# Altium PCB dev_board_layout.PcbDoc (part 3 of 3)
Units mm, origin at the board's own origin, x right, y up, seen from the top; angles counter-clockwise.
Board outline 75.44 x 30.86 mm, 2 copper layers (Top Layer, Bottom Layer); 166 components, 99 nets, 533 pads, 297 vias.
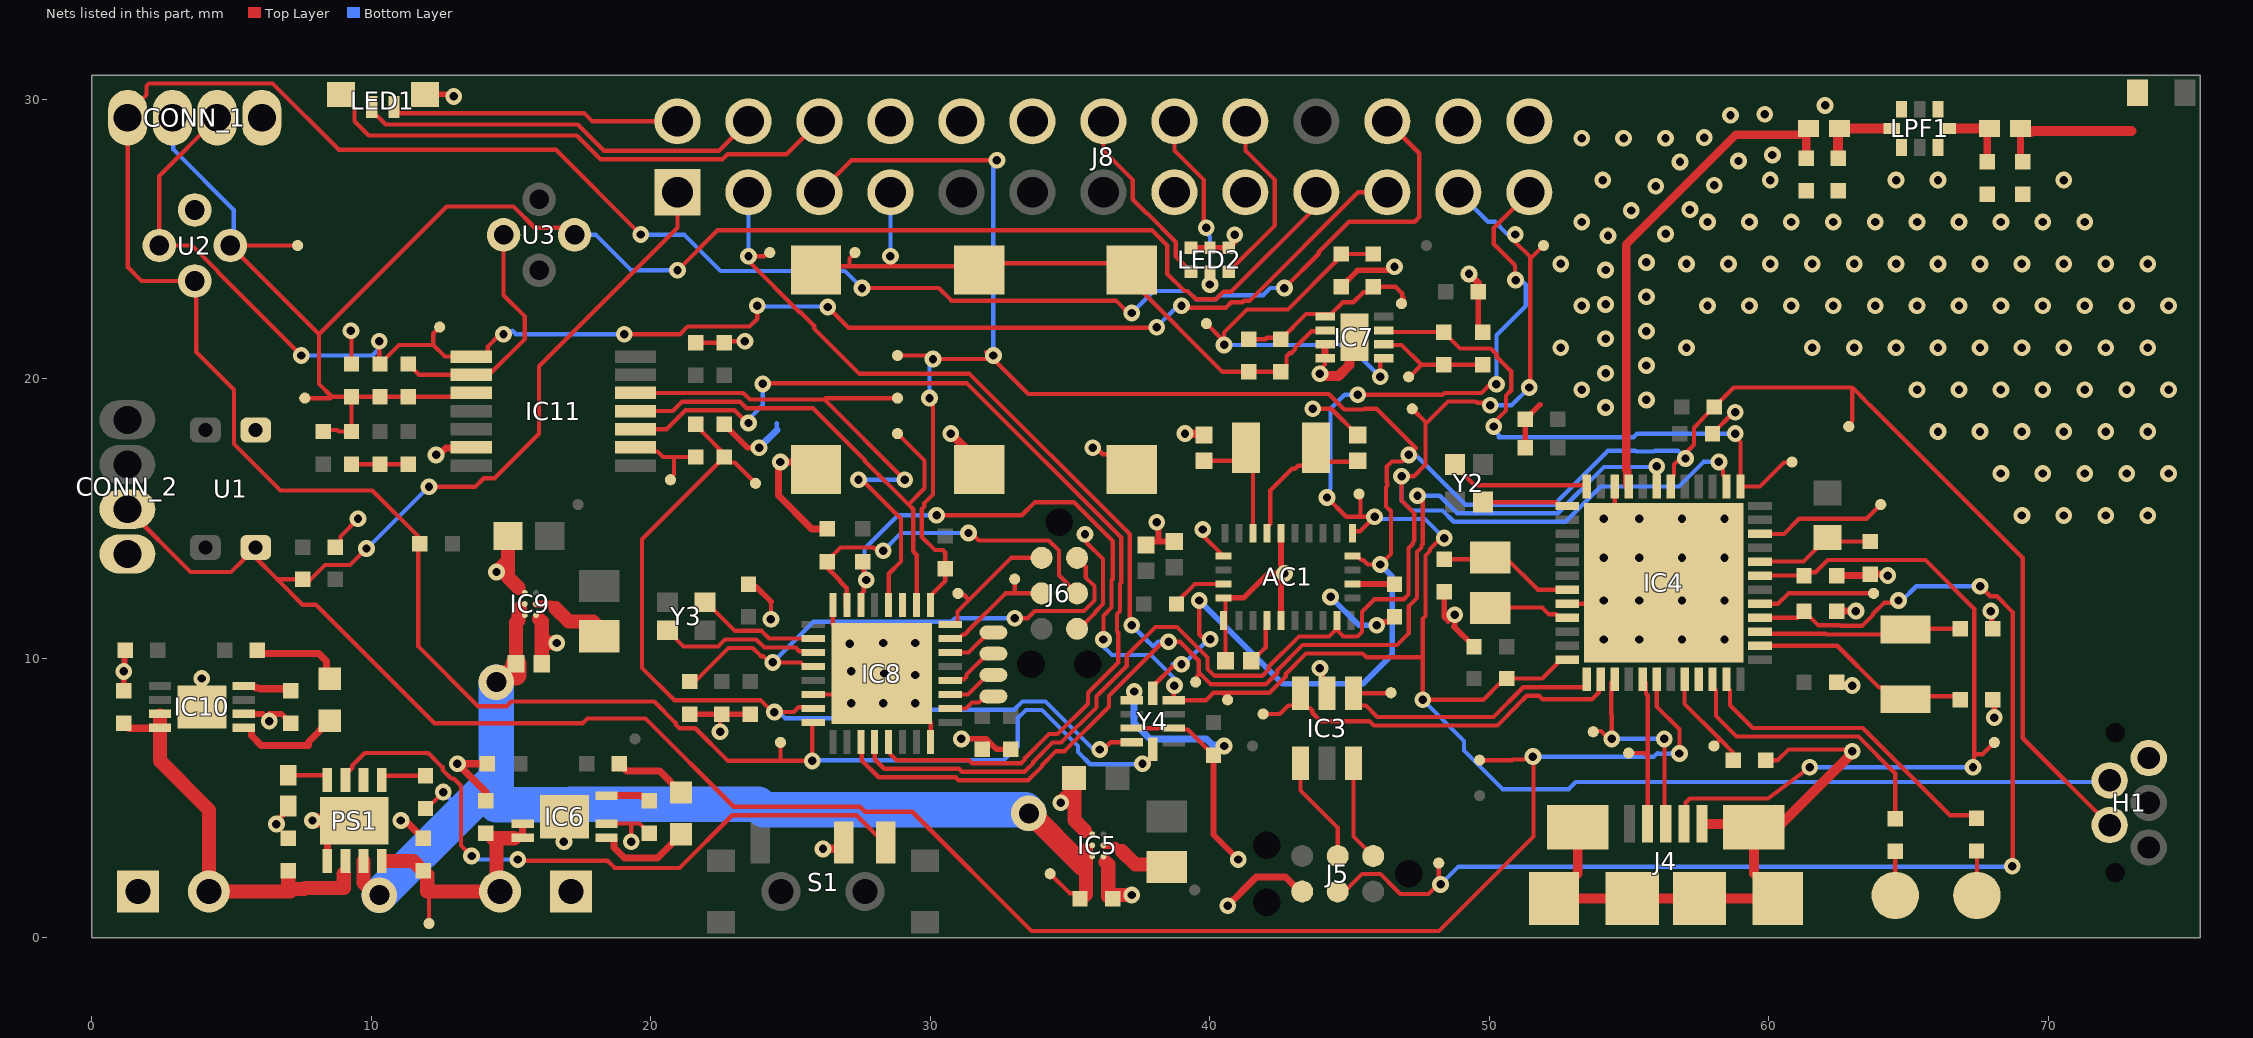
[diagram p2: the nets of this part, all layers, seen from the top]

## Via types
v1: diameter 0.6, hole 0.3, Top Layer to Bottom Layer, tented both sides, 260 vias
v2: diameter 0.6, hole 0.3, Top Layer to Bottom Layer, tented bottom, 25 vias
v3: diameter 1.27, hole 0.711, Top Layer to Bottom Layer, tented both sides, 8 vias
v4: diameter 0.762, hole 0.381, Top Layer to Bottom Layer, tented both sides, 2 vias
v5: diameter 1, hole 0.5, Top Layer to Bottom Layer, tented both sides, 2 vias

## Nets (pads, with @x,y where several pads share a name; then routed paths per layer and width w, separated by ;. In a path a pad name is that pad's centre, name@x,y a point inside that pad or via, vN(x,y) a via of type N, cw(c..) or ccw(c..) an arc to the next point about the centre after c; other vN are vias at no path point) (continued)
BLINK_SIG: CONN_2.2 IC4.42 J8.1 R3.1 TP3.1 U1.3 | length 94.5
  Top Layer w0.152: CONN_2.2@1.27,15.329 1.283,15.329 3.531,13.081 4.984,13.081 5.421,13.518 5.421,13.537 5.845,13.961 U1.3@5.864,13.961 5.864,13.591 6.628,12.827 ; v1(9.829,13.925) 9.234,13.331 8.343,13.331 7.793,12.781 7.747,12.735 7.747,12.827 R3.1@7.544,12.827 6.628,12.827 ; v1(12.065,16.129) 13.716,16.129 14.024,16.437 14.409,16.437 16.002,18.03 16.002,20.447 20.955,25.4 J8.1@20.955,26.67 ; TP3.1@49.657,6.35 50.814,6.35 50.835,6.371 51.249,6.371 51.27,6.391 51.476,6.391 v1(51.562,6.477) 51.583,6.456 51.583,3.618 48.206,0.241 33.622,0.241 29.356,4.507 27.661,4.507 27.483,4.684 22.968,4.684 19.812,7.841 17.732,7.841 17.562,7.671 12.258,7.671 8.016,11.913 7.542,11.913 6.628,12.827 ; IC4.42@55.99,9.246 55.99,8.272 56.804,7.458 v1(56.804,6.591)
  Bottom Layer w0.152: v1(9.829,13.925) 9.845,13.925 12.049,16.129 v1(12.065,16.129) ; v1(51.562,6.477) 55.894,6.477 56.021,6.604 56.042,6.583 56.48,6.583 56.501,6.604 56.769,6.604 56.782,6.591 v1(56.804,6.591)
BOOT0: IC4.4 J5.4 R8.2 TP14.1 | length 45.3
  Top Layer w0.152: J5.4@44.577,1.651 44.698,1.772 44.952,1.772 45.453,2.273 46.105,2.273 46.693,1.685 ; 46.694,1.685 46.817,1.562 47.824,1.562 48.167,1.905 v1(48.26,1.905) 48.193,1.972 TP14.1@48.193,2.667 ; IC4.4@59.69,11.446 61.027,11.446 R8.2@61.265,11.684 61.768,11.18 62.541,11.18 62.566,11.155 63.338,11.155 63.731,11.548 63.731,11.586 64.124,11.979 64.557,11.979 v1(64.643,12.065) ; v1(67.564,12.573) 67.924,12.213 68.164,12.213 68.728,11.649 68.728,2.561 v1(68.717,2.55)
  Bottom Layer w0.152: v1(48.26,1.905) 48.895,2.54 68.707,2.54 v1(68.717,2.55) ; v1(64.643,12.065) 64.77,12.065 65.278,12.573 v1(67.564,12.573)
BOOT0_ALT: IC8.31 J6.4 R17.2 | length 13.6
  Top Layer w0.152: IC8.31@26.964,11.9 26.964,12.24 26.956,12.249 26.964,12.249 IC8.31@27.009,12.204 ; v1(28.321,13.843) 28.235,13.929 27.985,13.929 27.954,13.959 26.786,13.959 26.299,13.472 26.187,13.36 26.776,12.771 26.776,12.735 27.009,12.502 IC8.31@27.009,12.204 ; v1(31.369,14.478) 31.47,14.478 31.737,14.211 34.241,14.211 34.605,13.847 34.605,12.967 J6.4@35.253,12.319 ; IC8.31@27.009,12.204 27.013,12.2 IC8.31@27.013,11.9 27.009,11.904 IC8.31@27.009,12.204
  Bottom Layer w0.152: v1(28.321,13.843) 28.956,14.478 v1(31.369,14.478)
CMOUT: C44.1 C47.1 C48.2 C51.2 CONN_1.2 IC11.3 J8.19 R25.1 TP46.1 TP53.1 U2.2 U3.2 | length 65.9
  Top Layer w0.152: TP53.1@7.366,24.765 U2.2@4.953,24.765 8.128,21.59 ; TP46.1@7.62,19.304 8.534,19.304 8.585,19.355 ; C51.2@8.277,18.11 8.328,18.161 8.785,18.161 8.836,18.11 R25.1@9.293,18.11 9.357,18.174 9.293,18.237 C48.2@9.293,19.355 ; IC11.3@13.577,19.491 13.441,19.355 C47.1@11.325,19.355 C44.1@10.309,19.355 C48.2@9.293,19.355 ; U3.2@17.272,25.146 17.018,25.4 15.846,25.4 15.084,26.162 12.7,26.162 8.128,21.59 ; v1(20.955,23.876) 22.391,25.312 37.934,25.312 38.481,24.765 38.481,23.749 39.095,23.135 39.208,23.135 39.503,22.839 40.224,22.839 40.499,23.114 40.767,23.114 43.815,26.162 J8.19@43.815,26.67 ; 8.128,21.59 8.128,19.812 8.585,19.355 ; 8.585,19.355 C48.2@9.293,19.355
  Bottom Layer w0.152: CONN_1.2@2.883,29.337 2.917,29.303 2.917,28.198 5.08,26.035 5.08,24.892 U2.2@4.953,24.765 ; U3.2@17.272,25.146 18.034,25.146 19.304,23.876 v1(20.955,23.876)
EXPANSION_INT: IC4.19 IC8.11 J8.3 TP9.1 TP43.1 | length 66
  Top Layer w0.152: TP9.1@24.257,24.511 24.19,24.511 24.063,24.384 v1(23.495,24.384) 23.495,24.21 25.332,22.373 25.365,22.373 25.845,21.893 25.845,21.795 27.467,20.172 31.407,20.172 37.139,14.44 v1@37.139,11.231 ; IC8.11@27.545,6.655 27.545,6.346 28.155,5.737 30.902,5.737 31.008,5.63 33.503,5.63 33.994,6.121 33.994,6.166 34.501,6.673 34.808,6.673 36.395,8.26 36.395,8.654 38.246,10.505 38.441,10.505 v1(38.526,10.591) 38.925,10.591 39.608,9.908 39.608,9.495 39.648,9.455 ; TP43.1@39.497,9.144 39.544,9.191 39.544,9.352 39.648,9.455 ; v1(47.434,15.811) 47.625,15.621 47.625,14.081 47.579,14.034 47.579,13.965 47.417,13.804 47.417,12.153 47.117,11.853 47.117,10.884 46.705,10.472 43.321,10.472 42.413,9.564 42.413,9.473 42.002,9.063 40.04,9.063 39.648,9.455 ; IC4.19@55.99,16.146 55.998,16.154 55.998,16.882 55.991,16.875 v1(55.991,16.862)
  Bottom Layer w0.152: v1(23.495,24.384) J8.3@23.495,26.67 ; v1(37.211,11.176) 37.815,10.572 37.821,10.572 37.979,10.414 38.155,10.591 v1(38.526,10.591) ; v1(47.434,15.811) 48.232,15.811 48.859,15.184 52.451,15.184 54.108,16.841 55.97,16.841 v1(55.991,16.862)
GND: AC1.2 AC1.5 AC1.6 AC1.10 AC1.25 C9.1 C10.2 C11.2 C12.2 C13.1 C14.1 C15.1 C16.2 C17.2 C18.2 C19.2 C20.2 C21.2 C22.2 C23.2 C24.1 C25.1 C26.2 C27.2 C28.2 C31.1 C32.2 C33.2 C34.1 C35.1 C36.1 C37.2 C38.2 C39.2 C40.1 C41.1 C42.2 C43.2 C45.1 C46.2 C48.1 C49.2 C52.2 C53.2 C54.2 C55.2 C56.2 CONN_1.4 CONN_2.1 D1.2 D2.2 D3.2 H1.5 IC3.2 IC4.22 IC4.32 IC4.49 IC5.A1 IC5.C2 IC6.6 IC6.9 IC7.3 IC7.4 IC7.9 IC8.6 IC8.16 IC8.32 IC8.33 IC9.A1 IC9.C2 IC10.6 IC10.9 IC11.6 J4.5 J4.6 J4.7 J4.8 J4.9 J4.10 J4.11 J5.6 J6.6 J8.8 J8.10 J8.12 J8.15 J8.24 J8.26 LED1.2 LED2.4 LED2.5 LED2.6 LPF1.1 LPF1.3 LPF1.5 LPF1.7 P3.1 P4.1 PS1.5 PS1.9 R2.1 R8.1 R10.1 R11.2 R14.1 R17.1 R20.1 R22.1 R27.2 S1.2 U1.4 U2.1 Y4.1 Y4.3 Y4.7 | length 149.9
  Top Layer w0.152: IC10.9@3.937,8.255 v1(3.937,9.271) ; R2.1@8.712,13.97 8.895,14.153 8.895,14.356 v1(9.525,14.986) v1@9.398,15.113 ; v1(9.271,21.717) 9.293,21.695 C48.1@9.293,20.523 ; IC6.6@18.415,4.08 19.304,4.08 ; v1(19.304,3.429) 19.304,4.08 ; R10.1@19.939,3.734 19.593,4.08 19.304,4.08 ; C45.1@21.612,21.285 C46.2@22.628,21.285 22.679,21.336 v1(23.368,21.336) ; v1(22.479,7.366) 22.479,7.937 C36.1@22.536,7.994 ; v1(24.298,11.389) 24.298,12.024 ; IC8.6@25.813,8.7 27.513,8.7 IC8.33@28.263,9.45 ; IC8.32@26.513,11.9 26.513,11.2 IC8.33@28.263,9.45 ; IC8.16@30.013,7 30.013,7.7 28.356,9.358 v2(28.356,9.45) IC8.33@28.263,9.45 ; J6.6@35.253,11.049 35.329,11.049 35.89,11.61 35.89,11.645 36.18,11.935 36.18,13.542 35.592,14.129 35.592,14.377 v1(35.534,14.435) ; v1(35.814,17.526) 35.941,17.526 36.172,17.295 36.661,17.295 D1.2@37.211,16.745 ; Y4.3@37.211,7.493 Y4.7@38.711,7.493 38.755,7.449 39.211,7.449 C39.2@40.132,6.528 ; Y4.1@37.211,8.493 37.211,8.722 v1(37.295,8.806) ; v1(39.751,14.605) 39.751,14.391 AC1.2@40.486,13.656 ; AC1.5@40.486,12.156 40.512,12.156 40.561,12.107 40.561,11.343 C54.2@40.561,9.906 ; v1(43.688,18.923) 44.348,18.923 45.285,17.986 C56.2@45.295,17.986 ; v1@44.028,20.089 v1(43.942,20.175) 43.942,20.32 44.128,20.506 IC7.4@44.128,20.725 ; IC7.9@44.997,21.294 IC7.9@45.178,21.475 ; R14.1@49.606,21.823 R14.1@49.763,21.666 ; C28.2@49.606,23.114 49.606,23.419 ; IC4.32@52.79,11.946 55.49,11.946 IC4.49@56.24,12.696 54.49,14.446 IC4.22@54.49,16.146 ; C21.2@57.988,18.034 58.75,18.796 v1(58.801,18.796) ; C9.1@59.893,6.35 60.325,6.35 60.706,6.731 62.929,6.731 v1(62.992,6.667) ; C17.2@62.433,9.144 62.56,9.017 v1(62.992,9.017) ; v1@66.055,27.11 v1(66.059,27.106)
  Top Layer w0.203: C43.2@1.143,8.839 v1(1.143,9.525) 1.168,9.55 1.168,10.262 C42.2@1.194,10.287 ; IC10.6@5.437,8.005 5.441,8.001 6.111,8.001 6.35,7.762 v1(6.35,7.747) ; v1@6.35,8.001 6.782,8.001 R22.1@7.112,7.671 ; v1(6.604,4.064) 6.604,4.158 6.828,4.381 6.828,4.512 R20.1@7.026,4.71 ; LED1.2@11.914,30.172 12.881,30.172 v1(12.954,30.099) ; v1(16.891,3.429) 16.915,3.453 IC6.9@16.915,4.33 ; C32.2@21.393,7.994 C36.1@22.536,7.994 C35.1@23.552,7.994 ; C49.2@22.628,18.364 23.466,17.526 v1(23.876,17.526) ; C31.1@23.768,12.554 24.298,12.024 ; v1(31.115,7.112) 32.004,7.112 32.373,6.743 C34.1@32.881,6.743 ; C53.2@37.592,14.176 38.163,14.176 ; v1(38.1,14.859) 38.163,14.795 38.163,14.176 ; C52.2@38.735,14.176 38.163,14.176 ; LED2.6@39.33,24.682 LED2.5@40.005,24.682 LED2.4@40.68,24.682 40.894,24.896 v1(40.894,25.146) ; C39.2@40.132,6.528 40.132,3.683 v1(41.021,2.794) ; AC1.5@40.512,12.156 41.213,12.156 42.087,13.03 v1(42.676,13.03) ; AC1.10@42.549,11.343 v1@42.549,12.796 ; 42.549,13.348 AC1.25@42.549,14.468 ; v1(43.942,9.639) 44.018,9.563 44.018,8.921 IC3.2@44.196,8.743 ; R11.2@44.704,23.292 45.288,23.876 46.482,23.876 v1(46.609,24.003) ; v1@46.213,11.307 46.436,11.307 R27.2@46.609,11.481 ; C16.2@48.387,12.37 48.387,11.481 48.539,11.328 ; v1(48.768,11.557) 48.768,11.176 48.73,11.138 C19.2@49.454,10.414 ; R14.1@49.606,21.823 C28.2@49.606,23.114 ; C22.2@51.287,17.526 C23.2@51.287,18.542 51.816,19.071 ; v1(67.945,11.684) 67.983,11.646 67.983,11.087 C11.2@68.021,11.049 ; C10.2@68.021,8.509 67.945,8.509 68.072,8.382 v1(68.072,7.874)
  Top Layer w0.254: PS1.5@8.427,2.745 PS1.9@8.427,3.595 ; PS1.9@9.398,4.191 PS1.9@10.031,3.558 ; v1(11.06,4.191) 10.922,4.191 10.898,4.167 11.243,4.167 C37.2@11.852,3.558 ; v1(12.319,17.272) 12.337,17.29 12.438,17.29 12.671,17.522 13.558,17.522 IC11.6@13.577,17.541 ; C27.2@14.097,4.902 14.097,5.207 v1(13.081,6.223) C26.2@14.148,6.223 ; D3.2@26.272,16.381 D3.2@25.908,16.745 25.546,16.745 25.273,17.018 v1(24.638,17.018) 24.572,16.952 24.572,15.814 25.762,14.624 R17.1@26.315,14.624 ; v1(40.64,1.143) 41.135,1.638 41.135,1.644 41.663,2.172 42.711,2.172 43.232,1.651 J5.6@43.307,1.651 ; IC7.4@44.128,20.725 IC7.3@44.128,21.225 ; v1(49.276,23.749) 49.606,23.419 ; R8.1@62.433,11.684 v1(63.119,11.684) ; C20.2@62.433,12.954 63.576,12.954 C18.2@63.627,13.005 64.211,13.005 v1(64.262,12.954)
  Top Layer w0.305: v1(26.162,3.175) 26.714,3.175 26.912,3.373 S1.2@26.912,3.401 ; v1(30.734,18.034) 31.75,17.018 D2.2@31.75,16.745 ; v1(39.116,18.034) 39.747,18.034 C55.2@39.795,17.986
  Top Layer w0.356: v1@44.028,20.089 44.6,20.089 44.997,20.486 IC7.9@44.997,21.294 ; J4.6@53.859,3.556 53.168,3.556 53.168,2.297 52.318,1.447 J4.8@52.318,1.397 J4.9@55.118,1.397 J4.10@57.518,1.397 60.068,1.397 60.068,1.697 59.468,2.297 J4.7@59.468,3.947 ; J4.5@57.618,3.597 J4.5@57.618,4.072 59.343,4.072 J4.7@59.468,3.947 ; v1(62.992,6.667) 62.992,6.604 60.335,3.947 J4.7@59.468,3.947
  Top Layer w0.508: v1(7.898,4.191) PS1.9@9.023,4.191 ; PS1.9@8.427,3.595 PS1.9@9.023,4.191 ; PS1.9@9.398,4.191 PS1.9@9.023,4.191 ; v1(14.478,13.081) 14.89,13.493 ; C41.1@14.89,14.37 14.89,13.493 ; 15.264,12.518 14.89,12.892 14.89,13.493 ; 16.004,11.405 16.1,11.309 16.1,10.554 ; C40.1@16.1,9.798 16.1,10.554 ; v1(16.637,10.541) 16.624,10.554 16.1,10.554 ; v1(34.671,4.826) 35.147,5.302 C25.1@35.147,5.715 ; C25.1@35.16,5.677 35.16,4.199 35.534,3.825 ; 36.274,2.712 36.37,2.616 36.37,1.476 36.418,1.524 v1(37.211,1.524)
  Bottom Layer w0.152: 24.511,18.161 24.511,18.415
  Bottom Layer w0.203: v1(44.323,12.192) 45.339,11.176 v1(45.974,11.176)
  Bottom Layer w0.254: v1(23.876,17.526) 24.511,18.161 ; v1(37.295,8.806) 37.295,7.683 37.866,7.112 39.878,7.112 40.101,6.889 40.482,6.889 v1(40.513,6.858)
  other v1: 69.059,15.106 70.559,15.106 72.059,15.106 73.559,15.106 68.309,16.606 69.809,16.606 71.309,16.606 72.809,16.606 74.309,16.606 66.059,18.106 67.559,18.106 69.059,18.106 70.559,18.106 72.059,18.106 73.559,18.106 54.164,18.968 55.624,19.24 53.309,19.606 65.309,19.606 66.809,19.606 68.309,19.606 69.809,19.606 71.309,19.606 72.809,19.606 74.309,19.606 54.164,20.198 55.624,20.47 52.559,21.106 57.059,21.106 61.559,21.106 63.059,21.106 64.559,21.106 66.059,21.106 67.559,21.106 69.059,21.106 70.559,21.106 72.059,21.106 73.559,21.106 54.164,21.428 55.624,21.7 53.309,22.606 57.809,22.606 59.309,22.606 60.809,22.606 62.309,22.606 63.809,22.606 65.309,22.606 66.809,22.606 68.309,22.606 69.809,22.606 71.309,22.606 72.809,22.606 74.309,22.606 54.164,22.658 55.624,22.93 54.164,23.888 52.559,24.106 57.059,24.106 58.559,24.106 60.059,24.106 61.559,24.106 63.059,24.106 64.559,24.106 66.059,24.106 67.559,24.106 69.059,24.106 70.559,24.106 72.059,24.106 73.559,24.106 55.624,24.16 54.25,25.115 56.311,25.18 53.309,25.606 57.809,25.606 59.309,25.606 60.809,25.606 62.309,25.606 63.809,25.606 65.309,25.606 66.809,25.606 68.309,25.606 69.809,25.606 71.309,25.606 55.085,26.018 57.181,26.05 55.955,26.888 58.051,26.92 54.059,27.106 60.059,27.106 64.559,27.106 70.559,27.106 56.825,27.758 58.92,27.789 60.132,28.002 53.309,28.606 54.809,28.606 56.309,28.606 57.694,28.627 58.633,29.423 59.862,29.462 62.017,29.778
  other v2: 27.178,8.382 28.321,8.382 29.464,8.382 29.464,9.398 27.178,9.525 27.12,10.516 28.321,10.541 29.464,10.541 54.102,10.668 55.372,10.668 56.896,10.668 58.42,10.668 54.102,12.065 55.372,12.065 56.896,12.065 58.42,12.065 54.102,13.589 55.372,13.589 56.896,13.589 58.42,13.589 54.102,14.986 55.372,14.986 56.896,14.986 58.42,14.986
I2C1_SCL: AC1.19 H1.2 IC4.18 IC8.25 J8.5 R6.1 R15.1 TP6.1 TP41.1 Y4.10 | length 108.9
  Top Layer w0.152: J8.5@26.035,26.67 27.178,27.813 v1(32.385,27.813) ; TP41.1@28.829,20.828 29.851,20.828 29.978,20.701 v1(30.099,20.701) 32.01,20.701 v1@32.134,20.825 ; v1(29.972,19.304) 29.972,19.253 29.921,19.253 30.099,19.075 30.099,15.86 29.789,15.55 29.789,15.424 29.697,15.332 29.697,14.337 30.168,13.866 30.448,13.866 30.537,13.777 R15.1@30.537,13.201 30.537,12.757 30.013,12.233 IC8.25@30.013,11.9 ; v1@32.194,20.764 33.507,19.452 44.26,19.452 44.815,18.897 45.514,18.897 45.54,18.923 45.97,18.923 47.369,17.524 v1(47.117,17.272) ; Y4.10@37.961,8.743 37.961,8.993 38.661,9.693 38.903,9.693 v1(38.989,9.779) ; v1(39.624,12.065) 39.624,10.854 39.878,10.6 39.956,10.679 v1(40.016,10.679) ; AC1.19@45.112,13.656 45.274,13.656 45.421,13.51 45.494,13.51 45.654,13.349 v1(46.101,13.349) 46.482,13.73 46.482,15.254 46.304,15.432 46.304,16.128 46.355,16.179 46.355,16.27 46.334,16.291 46.334,16.856 46.517,17.039 46.884,17.039 v1(47.117,17.272) ; v1@47.371,17.272 v1(47.117,17.272) ; IC4.18@56.49,16.146 56.49,16.421 56.611,16.542 56.611,16.926 57.323,17.638 57.323,18.242 57.619,18.538 57.619,18.553 R6.1@58.052,18.986 58.75,19.685 62.992,19.685 ; TP6.1@62.865,18.288 62.865,18.355 62.992,18.482 62.992,19.685 ; H1.2@72.198,4.026 69.088,7.136 69.088,13.589 63.6,19.077 63.59,19.077 63.28,19.387 63.28,19.397 62.992,19.685 ; v1@32.134,20.825 32.137,20.828 32.194,20.828 v1(32.258,20.828) 32.131,20.955 32.004,20.955 v1@32.134,20.825
  Bottom Layer w0.152: v1(29.972,19.304) v1@29.972,20.612 ; v1(32.258,20.828) 32.258,27.686 v1(32.385,27.813) ; 38.667,9.779 38.677,9.769 38.686,9.779 v1(38.989,9.779) 39.053,9.779 39.952,10.679 v1(40.016,10.679) ; v1(47.117,17.272) 47.371,17.272 49.154,15.489 52.319,15.489 54.25,17.42 55.222,17.42 55.251,17.39 55.903,17.39 55.932,17.42 56.748,17.42 v1(57.023,17.145)
  Bottom Layer w0.203: v1(39.624,12.065) 42.604,9.085 45.488,9.085 46.528,10.125 46.528,12.921 46.101,13.348 v1(46.101,13.349)
I2C1_SDA: AC1.20 H1.4 IC4.36 IC8.30 J8.25 R7.1 R16.1 TP7.1 TP49.1 Y4.9 | length 93.6
  Top Layer w0.152: IC8.30@27.464,11.636 27.489,11.661 27.489,12.262 27.616,12.389 R16.1@27.616,13.201 ; v1(30.226,15.113) 33.274,15.113 33.744,15.583 35.134,15.583 36.53,14.187 36.53,12.835 36.485,12.79 36.485,11.809 36.195,11.519 v1(36.195,10.668) ; v1(38.735,9.017) 38.711,8.993 Y4.9@38.711,8.493 39.862,8.493 40.127,8.758 40.472,8.758 ; TP7.1@40.64,8.509 40.64,8.576 40.53,8.686 40.53,8.7 40.472,8.758 ; v1(44.196,15.748) 44.883,15.061 45.391,15.061 ; AC1.20@45.112,14.468 45.112,14.49 45.161,14.538 45.376,14.538 v1(45.899,15.061) 45.391,15.061 ; v1(45.295,19.426) 48.332,19.426 48.398,19.492 49.718,19.492 50.08,19.854 50.206,19.854 v1(50.258,19.802) ; TP49.1@45.339,15.875 45.386,15.828 45.386,15.667 45.391,15.662 45.391,15.061 ; v1(48.387,14.296) 48.272,14.296 47.883,13.908 47.883,13.839 47.722,13.677 47.722,11.51 47.625,11.413 47.625,10.03 ; v1(50.943,23.527) 50.918,23.552 50.918,24.056 50.165,24.809 50.165,25.4 J8.25@51.435,26.67 ; IC4.36@52.79,9.946 52.574,9.946 51.899,9.271 R7.1@50.622,9.271 50.423,9.072 50.347,9.072 49.784,8.509 v1(47.625,8.509) 47.625,10.03 ; 40.472,8.758 42.128,8.758 42.717,9.347 42.717,9.438 43.447,10.167 45.468,10.167 45.604,10.03 47.625,10.03
  Bottom Layer w0.152: v1(27.706,12.795) 27.643,12.858 27.643,13.913 28.843,15.113 v1(30.226,15.113) ; v1(36.195,10.668) 36.131,10.604 36.131,10.478 36.5,10.109 37.897,10.109 38.735,9.271 v1(38.735,9.017) ; v1(44.196,15.748) 44.282,15.834 44.282,16.02 44.323,16.061 44.323,18.923 44.826,19.426 v1(45.295,19.426) ; v1(45.899,15.061) 45.982,14.978 47.705,14.978 v1(48.387,14.296) ; v1(47.625,8.509) 49.094,7.04 49.094,6.697 50.477,5.313 52.843,5.313 53.097,5.567 72.139,5.567 H1.4@72.198,5.626 ; v1(50.258,19.802) 50.258,21.556 51.308,22.606 51.308,23.368 51.234,23.442 51.028,23.442 v1(50.943,23.527)
IMU_CLK_IN: AC1.27 C55.1 Y5.1 | length 5.1
  Top Layer w0.152: C55.1@39.795,17.066 41.057,17.066 41.057,17.288 Y5.1@41.295,17.526 41.549,17.526 AC1.27@41.549,14.468
IMU_CLK_OUT: AC1.26 C56.1 Y5.2 | length 5.7
  Top Layer w0.152: AC1.26@42.049,14.468 42.049,14.68 42.164,14.795 42.164,15.995 42.945,16.776 43.045,16.776 43.156,16.887 43.371,16.887 43.795,17.31 Y5.2@43.795,17.45 ; Y5.2@43.795,17.526 Y5.2@43.795,17.45 ; C56.1@45.295,17.066 45.295,17.026 44.219,17.026 Y5.2@43.795,17.45
IMU_INT: AC1.14 IC4.14 IC8.12 J8.23 TP8.1 TP48.1 | length 60.7
  Top Layer w0.152: IC8.12@28.013,6.687 28.013,6.383 28.354,6.042 31.028,6.042 31.135,5.935 33.377,5.935 33.689,6.247 33.689,6.292 34.375,6.978 34.682,6.978 35.945,8.241 35.945,8.635 37.028,9.718 37.028,10.09 38.058,11.119 38.827,11.119 39.92,10.027 39.92,9.614 40.166,9.367 41.876,9.367 42.108,9.6 42.108,9.69 43.195,10.777 44.269,10.777 AC1.14@44.5,11.008 ; AC1.14@44.549,11.343 44.549,11.008 44.781,10.777 45.282,10.777 45.445,10.941 45.445,11.663 45.89,12.108 46.941,12.108 47.113,12.28 47.113,13.93 47.274,14.091 47.274,14.16 47.32,14.207 47.32,15.178 46.863,15.635 v1@46.863,16.27 ; v1(46.863,16.51) 47.307,16.51 47.72,16.923 47.72,18.383 ; TP48.1@47.244,18.923 47.72,18.447 47.72,18.383 ; v1(50.038,19.05) 49.952,19.136 49.568,19.136 49.516,19.187 48.524,19.187 47.72,18.383 ; v1(50.927,25.16) 50.927,24.892 51.471,24.348 ; v1(51.435,19.685) 51.471,19.721 51.471,23.419 51.471,24.348 ; TP8.1@51.943,24.765 51.526,24.348 51.471,24.348 ; v1@58.254,17.023 v1(58.219,17.023) 58.219,16.902 58.369,16.753 58.369,16.542 58.49,16.421 IC4.14@58.49,16.146
  Bottom Layer w0.152: v1(46.863,16.51) 46.863,15.635 47.216,15.283 48.33,15.283 48.733,14.88 52.724,14.88 53.99,16.146 56.786,16.146 57.663,17.023 v1(58.219,17.023) ; J8.23@48.895,26.67 49.952,25.613 50.206,25.613 50.659,25.16 v1(50.927,25.16) ; v1(50.038,19.05) 50.8,19.05 v1(51.435,19.685)
LED_LEFT_FRONT_B: J8.18 LED2.3 | length 6.5
  Top Layer w0.152: LED2.3@40.68,23.832 42.329,25.481 42.329,27.106 41.275,28.16 J8.18@41.275,29.207
LED_LEFT_FRONT_G: J8.14 LED2.1 | length 6.7
  Top Layer w0.152: J8.14@36.195,29.207 36.195,28.16 37.249,27.106 37.249,26.403 37.744,25.908 37.769,25.908 38.786,24.891 38.786,24.376 LED2.1@39.33,23.832
LED_LEFT_FRONT_R: J8.16 LED2.2 | length 6.5
  Top Layer w0.152: J8.16@38.735,29.207 38.735,28.16 39.789,27.106 39.789,25.489 v1(39.878,25.4) ; v1@39.878,23.495 v1(40.005,23.368)
  Bottom Layer w0.152: v1(39.878,25.4) 39.964,25.314 39.964,25.128 40.005,25.087 v1(40.005,23.368)
LED_LEFT_SIDE_B: J8.4 LED1.4 | length 14.7
  Top Layer w0.152: LED1.4@10.014,29.722 10.014,29.522 10.138,29.398 10.215,29.398 10.519,29.093 17.389,29.093 18.329,28.153 22.441,28.153 J8.4@23.495,29.207
LED_LEFT_SIDE_G: J8.2 LED1.3 | length 10.4
  Top Layer w0.152: LED1.3@10.814,29.722 11.043,29.493 17.624,29.493 17.91,29.207 J8.2@20.955,29.207
LED_LEFT_SIDE_R: J8.6 LED1.1 | length 19
  Top Layer w0.152: LED1.1@8.914,30.172 8.964,30.172 9.338,29.798 9.338,29.748 9.398,29.688 9.398,29.21 9.906,28.702 17.349,28.702 18.202,27.849 22.568,27.849 22.747,28.028 24.856,28.028 J8.6@26.035,29.207
LH_DIODE_ARRAY: C30.2 D1.1 D2.1 D3.1 IC7.2 J8.7 R12.1 TP44.1 | length 24.1
  Top Layer w0.152: D3.1@25.908,24.022 27.109,24.022 ; TP44.1@27.305,24.511 27.305,24.494 27.109,24.298 27.109,24.022 ; v1@28.575,24.13 v1(28.575,24.384) ; IC7.2@44.128,21.725 44.099,21.696 43.639,21.696 43.049,21.106 43.049,21.043 42.915,20.909 42.851,20.909 42.744,20.801 42.744,20.443 C30.2@42.545,20.244 R12.1@41.402,20.244 40.462,20.244 37.211,23.495 D1.1@37.211,23.895 36.976,24.13 31.985,24.13 31.877,24.022 27.109,24.022
  Bottom Layer w0.152: v1(28.575,24.384) J8.7@28.575,26.67
LH_INV_AMP_N: IC7.6 R13.1 R14.2 TP24.1 | length 4.5
  Top Layer w0.152: IC7.6@46.228,21.225 46.244,21.209 46.863,21.209 47.574,20.498 ; TP24.1@47.117,20.066 47.143,20.066 47.574,20.498 ; R14.2@49.763,20.498 R13.1@48.366,20.498 47.574,20.498
LH_SIG: IC4.13 IC7.7 R13.2 TP23.1 | length 20.8
  Top Layer w0.152: IC7.7@46.228,21.725 46.287,21.666 R13.2@48.366,21.666 48.95,21.082 50.052,21.082 50.267,20.867 50.267,20.782 50.786,20.262 50.786,19.583 50.601,19.398 50.601,18.866 50.165,18.429 v1(50.165,18.288) ; v1(58.801,18.034) 58.747,17.98 58.99,17.738 IC4.13@58.99,16.391 ; IC4.13@59.064,16.465 IC4.13@58.99,16.391 ; TP23.1@60.833,17.018 60.818,17.003 60.547,17.003 59.69,16.146 IC4.13@58.99,16.146 IC4.13@58.99,16.391
  Bottom Layer w0.152: v1(50.165,18.288) 50.165,18.156 50.377,17.944 50.339,17.906 55.166,17.906 55.294,18.034 v1(58.801,18.034)
MUX_CTRL: PS1.2
MUX_STATUS: PS1.1 R19.2 | length 1.7
  Top Layer w0.152: PS1.1@10.373,5.641 10.373,5.692 10.472,5.791 R19.2@11.938,5.791
MUX_SWITCH: PS1.3 S1.3 | length 24.8
  Top Layer w0.152: PS1.3@9.073,5.641 9.073,5.891 9.172,5.99 9.23,5.99 9.319,6.079 9.319,6.161 9.763,6.604 11.96,6.604 11.963,6.6 12.045,6.6 12.552,6.093 12.552,6.004 12.862,5.694 12.951,5.694 13.208,5.437 13.208,3.302 v1(13.589,2.921) ; v1(15.24,2.794) 15.286,2.748 18.461,2.748 18.715,2.494 21.032,2.494 22.917,4.38 27.357,4.38 28.056,3.681 28.412,3.681 S1.3@28.412,3.401 28.412,3.285 S1.3@28.138,3.012
  Bottom Layer w0.152: v1(13.589,2.921) 13.716,2.794 v1(15.24,2.794)
NetAC1_4: AC1.4 R26.1 | length 2
  Top Layer w0.152: R26.1@38.811,11.938 38.811,12 39.467,12.656 AC1.4@40.486,12.656
NetAC1_9: AC1.9 C54.1 | length 1.7
  Top Layer w0.152: C54.1@41.481,9.906 41.529,9.906 41.999,10.376 AC1.9@41.999,11.082 ; AC1.9@42,11.082 42.049,11.131 AC1.9@42.049,11.343
NetAC1_17: AC1.17 R27.1 | length 1.5
  Top Layer w0.203: AC1.17@45.112,12.656 R27.1@46.602,12.656
  Top Layer w0.305: R27.1@46.602,12.656 R27.1@46.609,12.649
NetANT1_1: ANT1.1 C15.2 L2.2 | length 5.3
  Top Layer w0.254: C15.2@69.088,27.762 69.003,27.847 L2.2@69.003,28.956 69.176,28.783 69.395,28.783 69.479,28.867
  Top Layer w0.356: 69.479,28.867 72.987,28.867
NetC13_2: C13.2 L1.2 LPF1.8 | length 3
  Top Layer w0.356: C13.2@62.484,27.889 L1.2@62.484,28.914 ; L1.2@62.526,28.956 LPF1.8@64.405,28.956
  Top Layer w0.508: L1.2@62.484,28.914 L1.2@62.526,28.956
NetC14_2: C14.2 L2.1 LPF1.4 | length 2.7
  Top Layer w0.254: C14.2@67.818,27.762 67.818,28.871 L2.1@67.903,28.956
  Top Layer w0.356: LPF1.4@66.405,28.956 L2.1@67.903,28.956
NetC29_2: C29.2 IC7.5 R11.1 TP21.1 | length 14.8
  Top Layer w0.152: TP21.1@39.878,21.971 40.427,21.422 40.427,21.295 v1(40.513,21.209) 40.513,21.653 41.338,22.479 42.799,22.479 44.505,24.185 44.505,24.262 R11.1@44.704,24.46 C29.2@45.847,24.46 ; v1(46.101,20.066) 46.101,20.651 46.175,20.725 IC7.5@46.228,20.725
  Bottom Layer w0.152: v1(40.513,21.209) 44.958,21.209 v1(46.101,20.066)
NetC47_2: C47.2 IC11.2 U3.4 | length 8.9
  Top Layer w0.152: C47.2@11.325,20.523 11.707,20.141 IC11.2@13.577,20.141 14.213,20.141 15.494,21.422 15.494,22.225 14.732,22.987 U3.4@14.732,25.146
NetC50_2: C50.2 R24.1 R25.2 | length 2
  Top Layer w0.152: R25.2@9.293,16.942 R24.1@10.309,16.942 C50.2@11.325,16.942
NetDS1_1: DS1.1 R9.1 | length 2.6
  Top Layer w0.254: R9.1@18.872,6.223 19.126,5.969 20.308,5.969 DS1.1@21.082,5.195
NetDS1_2: DS1.2 IC6.5 | length 3.3
  Top Layer w0.254: IC6.5@18.598,3.58 18.665,3.58 18.688,3.557 18.688,3.226 19.064,2.85 20.237,2.85 DS1.2@21.082,3.695
NetDS2_1: DS2.1 R21.1 | length 3.3
  Top Layer w0.254: R21.1@5.918,10.16 8.128,10.16 8.397,9.891 8.397,9.371 DS2.1@8.509,9.259
NetDS2_2: DS2.2 IC10.5 | length 3.9
  Top Layer w0.254: IC10.5@5.437,7.505 5.687,7.505 5.71,7.482 5.71,7.232 6.062,6.88 7.747,6.88 7.747,6.997 DS2.2@8.509,7.759
NetIC3_4: IC3.4 J5.3 | length 3.9
  Top Layer w0.152: IC3.4@43.246,6.243 43.246,5.268 44.577,3.937 J5.3@44.577,2.921
NetIC3_6: IC3.6 J5.1 | length 3.6
  Top Layer w0.152: IC3.6@45.146,6.243 45.146,3.622 J5.1@45.847,2.921
NetIC4_5: IC4.5 TP18.1 | length 4.2
  Top Layer w0.152: IC4.5@59.69,11.946 60.333,11.946 60.706,12.319 TP18.1@63.754,12.319
NetIC4_10: IC4.10 TP19.1 | length 4.8
  Top Layer w0.152: IC4.10@59.69,14.446 60.547,14.446 61.093,14.992 62.698,14.992 62.703,14.986 63.5,14.986 TP19.1@64.008,15.494
NetIC5_B1: IC5.B1 L4.1 | length 2.6
  Top Layer w0.152: 36.755,3.197 36.861,3.091
  Top Layer w0.254: IC5.B1@36.22,3.302 36.65,3.302 36.755,3.197
  Top Layer w0.508: 36.861,3.091 37.338,2.614 38.2,2.614 L4.1@38.45,2.364
NetIC6_8: IC6.8 R10.2 | length 1.6
  Top Layer w0.254: IC6.8@18.415,5.08 19.642,5.08 19.672,5.05 19.791,5.05 R10.2@19.939,4.902
NetIC8_18: IC8.18 TP34.1 | length 1.7
  Top Layer w0.152: IC8.18@30.713,8.2 31.28,8.2 31.495,8.415 31.745,8.415 31.966,8.636 TP34.1@32.258,8.636
NetIC8_19: IC8.19 TP33.1 | length 1.8
  Top Layer w0.152: IC8.19@30.713,8.7 31.349,8.7 32.047,9.398 TP33.1@32.258,9.398
NetIC8_20: IC8.20 TP31.1 | length 2
  Top Layer w0.152: IC8.20@30.713,9.2 30.762,9.249 31.209,9.249 31.298,9.338 31.298,9.412 32.046,10.16 TP31.1@32.258,10.16
NetIC8_22: IC8.22 TP29.1 | length 1.8
  Top Layer w0.152: IC8.22@30.713,10.2 31.371,10.2 32.093,10.922 TP29.1@32.258,10.922
NetIC9_B1: IC9.B1 L5.1 | length 2.7
  Top Layer w0.152: 16.437,11.938 16.591,11.784
  Top Layer w0.254: IC9.B1@15.894,11.938 16.437,11.938
  Top Layer w0.508: 16.591,11.784 17.068,11.307 17.93,11.307 L5.1@18.18,11.057
NetIC10_8: IC10.8 R22.2 | length 1.7
  Top Layer w0.254: IC10.8@5.437,9.005 5.46,8.982 5.811,8.982 5.859,8.934 5.983,8.934 6.013,8.904 7.047,8.904 R22.2@7.112,8.839
NetIC11_9: IC11.9 R23.1 TP52.1 | length 2.6
  Top Layer w0.152: IC11.9@20.096,17.541 20.096,17.411 20.114,17.392 20.244,17.392 20.441,17.196 20.828,17.196 ; TP52.1@20.701,16.383 20.701,16.45 20.828,16.577 20.828,17.196 ; R23.1@21.612,17.196 20.828,17.196
NetP1_1: P1.1 R4.2 | length 1.6
  Top Layer w0.152: R4.2@67.437,3.099 67.449,3.087 P1.1@67.449,1.512
NetP2_1: P2.1 R5.2 | length 1.6
  Top Layer w0.152: P2.1@64.528,1.512 R5.2@64.528,3.087
NetPS1_4: PS1.4 R20.2 | length 1.5
  Top Layer w0.152: R20.2@7.026,5.81 8.324,5.81 8.423,5.711 PS1.4@8.423,5.641
NetQ1_1: 
NetQ1_2: 
NRST: C20.1 IC4.7 J4.4 TP11.1 | length 26.7
  Top Layer w0.152: J4.4@56.968,4.072 57.023,4.127 57.023,4.826 57.173,4.976 59.967,4.976 v1(61.468,6.096) ; IC4.7@59.69,12.946 59.698,12.954 C20.1@61.265,12.954 61.384,13.073 61.679,13.073 62.114,13.508 65.613,13.508 67.356,11.765 67.356,6.523 ; v1(67.31,6.096) 67.356,6.523 ; TP11.1@68.072,6.985 67.65,6.563 67.396,6.563 67.356,6.523
  Bottom Layer w0.152: v1(61.468,6.096) v1(67.31,6.096)
NRST_ALT: C32.1 IC8.4 J6.2 | length 19.4
  Top Layer w0.152: C32.1@21.393,9.163 21.584,9.163 22.784,10.363 23.647,10.363 23.938,10.072 24.019,10.072 24.243,9.849 v1(24.364,9.849) 24.367,9.846 25.375,9.846 25.464,9.757 25.464,9.749 25.513,9.7 IC8.4@25.813,9.7 ; v1(33.02,11.43) 33.484,11.43 33.738,11.684 35.498,11.684 35.875,12.061 35.875,12.577 35.56,12.892 35.56,13.282 J6.2@35.253,13.589
  Bottom Layer w0.152: v1(24.364,9.849) 25.819,11.303 30.763,11.303 30.89,11.43 v1(33.02,11.43)
PA0: 
RCC_OSC32_IN: C10.1 IC4.2 Y1.1 | length 8
  Top Layer w0.152: IC4.2@59.69,10.446 62.452,10.446 63.945,8.953 64.258,8.953 64.681,8.529 Y1.1@64.897,8.529 65.004,8.529 65.024,8.509 65.151,8.636 C10.1@66.853,8.636
RCC_OSC32_OUT: C11.1 IC4.3 Y1.2 | length 7.3
  Top Layer w0.152: IC4.3@59.69,10.946 59.76,10.876 62.042,10.876 62.067,10.851 64.719,10.851 64.917,11.049 C11.1@66.853,11.049
RCC_OSC_IN: IC4.25 Y2.3 | length 3.1
  Top Layer w0.152: Y2.3@49.776,15.581 52.38,15.581 52.515,15.446 IC4.25@52.79,15.446
RCC_OSC_IN_ALT: IC8.2 Y3.3 | length 4.4
  Top Layer w0.152: Y3.3@21.941,12 22.215,11.726 22.263,11.726 23.012,10.977 23.962,10.977 24.239,10.7 IC8.2@25.813,10.7
RCC_OSC_OUT: IC4.24 Y2.1 | length 5.1
  Top Layer w0.152: Y2.1@48.776,16.931 48.776,16.883 49.022,16.637 49.045,16.637 49.05,16.632 49.05,16.609 49.197,16.462 49.474,16.185 53.451,16.185 IC4.24@53.49,16.146
RCC_OSC_OUT_ALT: IC8.3 Y3.1 | length 5.8
  Top Layer w0.152: Y3.1@20.591,11 21.17,10.421 22.411,10.421 22.658,10.668 23.774,10.668 24.064,10.377 25.183,10.377 25.311,10.249 25.764,10.249 IC8.3@25.813,10.2
RF_OUT: C12.1 IC4.21 L1.1 | length 18
  Top Layer w0.305: IC4.21@54.99,16.146 54.945,16.191 54.945,16.697 54.894,16.748 54.894,24.795 58.831,28.732 61.127,28.732 61.351,28.956 L1.1@61.387,28.956 ; C12.1@61.341,27.889 61.341,28.91 L1.1@61.387,28.956 ; L1.1@61.426,28.956 L1.1@61.387,28.956
SPI3_MISO: IC8.27
SPI3_MOSI: IC8.28 IC11.12 TP36.1 | length 20.6
  Top Layer w0.152: IC11.12@19.453,19.491 23.308,19.491 23.546,19.253 26.213,19.253 ; v1(27.432,16.383) 27.559,16.383 28.956,14.986 28.956,13.462 28.513,13.019 IC8.28@28.513,11.9 ; TP36.1@28.829,19.304 26.264,19.304 26.213,19.253 ; v1(29.083,16.383) 26.213,19.253
  Bottom Layer w0.152: v1(27.432,16.383) v1(29.083,16.383)
SPI3_SCLK: IC8.26 IC11.11 TP38.1 | length 18.6
  Top Layer w0.152: IC11.11@19.453,18.841 20.785,18.841 21.116,19.173 23.195,19.173 23.424,18.944 25.808,18.944 27.658,17.093 27.658,17.06 29.217,15.501 ; TP38.1@28.829,18.034 29.794,17.069 29.794,16.078 29.217,15.501 ; IC8.26@29.488,11.659 29.513,11.684 29.513,13.703 29.393,13.823 29.393,15.326 29.217,15.501
SYS_SWCLK: IC4.41 J4.2 TP12.1 | length 6
  Top Layer w0.152: TP12.1@54.991,6.604 55.541,6.604 55.668,6.477 ; IC4.41@55.49,9.246 55.611,9.125 55.611,8.726 55.668,8.67 55.668,6.477 ; J4.2@55.668,4.072 55.668,6.477
SYS_SWCLK_ALT: IC8.24 J6.1 TP28.1 | length 5
  Top Layer w0.152: IC8.24@30.713,11.2 30.929,11.2 30.977,11.249 30.977,11.673 31.388,12.084 ; TP28.1@30.988,12.319 31.035,12.272 31.201,12.272 31.388,12.084 ; J6.1@33.983,13.589 32.893,13.589 31.388,12.084
SYS_SWDIO: IC4.39 J4.3 TP13.1 | length 7.9
  Top Layer w0.152: TP13.1@53.721,7.366 53.745,7.39 53.999,7.39 54.276,7.112 v1(54.38,7.112) 54.38,7.977 54.369,7.988 54.369,9.125 IC4.39@54.49,9.246 ; v1@56.134,7.239 v1(56.261,7.112) ; J4.3@56.318,4.072 56.275,4.115 56.275,6.905 56.298,6.928 v1@56.318,6.928
  Bottom Layer w0.152: v1(54.38,7.112) v1(56.261,7.112)
SYS_SWDIO_ALT: IC8.23 J6.3 TP30.1 | length 4.5
  Top Layer w0.152: IC8.23@30.713,10.7 31.013,10.7 IC8.23@31.062,10.749 ; IC8.23@31.062,10.757 IC8.23@31.062,10.749 ; TP30.1@33.02,12.827 33.02,12.319 ; J6.3@33.983,12.319 33.02,12.319 ; IC8.23@31.062,10.749 31.16,10.846 31.233,10.846 31.367,10.98 31.367,10.997 32.689,12.319 33.02,12.319
TP_AFE_OUT: C49.1 IC8.7 R23.2 TP26.1 Y4.4 | length 32.4
  Top Layer w0.152: R23.2@21.811,18.123 C49.1@22.683,17.251 ; R23.2@21.811,18.504 R23.2@21.811,18.546 ; TP26.1@23.749,16.256 23.003,17.002 22.822,17.002 C49.1@22.628,17.196 19.685,14.253 19.685,9.652 20.839,8.498 23.922,8.498 24.351,8.07 25.114,8.07 25.286,8.242 25.771,8.242 IC8.7@25.813,8.2 ; v1(36.068,6.731) 36.189,6.731 36.451,6.993 Y4.4@37.211,6.993
  Bottom Layer w0.152: v1(24.422,8.07) 24.506,8.153 24.806,7.853 29.683,7.853 29.983,8.153 33,8.153 33.3,8.453 34.118,8.453 35.841,6.731 v1(36.068,6.731)
TP_NOSE: C44.2 CONN_1.3 IC11.1 J8.21 TP47.1 U2.4 | length 57.5
  Top Layer w0.152: CONN_1.3@4.483,29.337 4.483,29.324 2.413,27.254 U2.4@2.413,24.765 3.585,24.765 4.512,23.838 4.512,23.809 v1(7.493,20.828) ; v1(10.287,21.336) 10.287,20.545 C44.2@10.309,20.523 10.995,21.209 12.214,21.209 ; TP47.1@12.446,21.844 12.214,21.612 12.214,21.209 ; v1(14.732,21.59) 14.605,21.59 14.17,21.155 14.17,20.94 13.932,20.701 13.716,20.701 13.626,20.791 IC11.1@13.577,20.791 12.632,20.791 12.214,21.209 ; v1(19.05,21.59) 21.044,21.59 21.318,21.865 23.532,21.865 23.812,22.145 v1(23.812,22.606) ; v1(26.332,22.563) 27.072,21.823 38.079,21.823 v1(38.1,21.844) ; v1(38.989,22.606) 39.06,22.535 40.569,22.535 40.767,22.733 41.161,22.733 41.212,22.784 41.419,22.784 45.305,26.67 J8.21@46.355,26.67
  Bottom Layer w0.152: v1(7.493,20.828) 10.033,20.828 10.287,21.082 v1(10.287,21.336) ; v1(14.732,21.59) 14.818,21.676 15.004,21.676 15.045,21.717 15.172,21.59 v1(19.05,21.59) ; v1(23.812,22.606) 23.834,22.584 26.267,22.584 26.289,22.606 v1(26.332,22.563) ; v1(38.1,21.844) 38.838,22.582 39.211,22.582 39.187,22.606 v1(38.989,22.606)
TP_SS: IC8.13 IC11.10 | length 36.5
  Top Layer w0.152: IC11.10@19.602,18.34 IC11.10@19.453,18.191 20.566,18.191 21.242,18.868 22.998,18.868 23.451,18.415 v1(23.495,18.415) ; v1(24.003,19.812) 24.024,19.833 31.315,19.833 36.834,14.314 36.834,12.708 36.79,12.664 36.79,11.683 36.682,11.575 36.682,10.957 36.724,10.916 36.724,9.845 35.64,8.761 35.64,8.367 34.556,7.283 34.249,7.283 33.384,6.419 33.384,6.374 33.25,6.24 31.495,6.24 31.388,6.346 28.793,6.346 28.562,6.578 28.562,6.951 IC8.13@28.513,7
  Bottom Layer w0.152: v1(23.495,18.415) 23.495,18.542 24.003,19.05 v1(24.003,19.812)
TP_THERMISTOR: CONN_1.1 IC8.8 J8.22 R1.1 TP40.1 U2.3 Y4.5 | length 115.3
  Top Layer w0.152: v1(19.638,25.16) 16.604,28.194 8.839,28.194 6.468,30.566 2.044,30.566 1.954,30.476 1.954,30.153 1.283,29.481 CONN_1.1@1.283,29.337 1.283,23.99 1.778,23.495 U2.3@3.683,23.495 3.734,23.444 3.734,20.955 5.085,19.603 5.085,17.662 6.745,16.002 10.033,16.002 11.684,14.351 11.684,14.097 11.684,10.414 13.818,8.28 14.836,8.28 15.006,8.45 20.125,8.45 20.89,7.685 20.89,7.625 21.024,7.491 21.592,7.491 22.758,6.325 24.638,6.325 ; TP40.1@24.638,6.985 24.638,6.325 ; IC8.8@25.763,7.7 25.781,7.682 v1(25.781,6.325) 24.638,6.325 ; v1(27.559,23.241) 30.306,23.241 30.755,22.791 36.645,22.791 37.211,22.225 v1(37.211,22.352) ; v1(37.592,6.223) 37.691,6.223 37.961,6.493 Y4.5@37.961,6.743 ; v1(42.672,23.241) 43.902,24.471 43.902,24.532 44.987,25.616 47.333,25.616 47.498,25.781 47.498,28.064 J8.22@46.355,29.207
  Bottom Layer w0.152: v1(19.638,25.16) 19.652,25.146 21.209,25.146 22.5,23.855 26.945,23.855 v1(27.559,23.241) ; v1(25.781,6.325) 25.806,6.35 32.639,6.35 33.126,6.837 33.126,7.712 ; 33.127,7.712 33.127,7.849 33.427,8.149 33.992,8.149 35.285,6.855 35.285,6.639 35.722,6.202 37.571,6.202 v1(37.592,6.223) ; v1(37.211,22.352) 37.994,23.135 39.208,23.135 39.503,22.839 40.224,22.839 40.372,22.987 41.91,22.987 42.164,23.241 v1(42.672,23.241)
TRANS_IMP_OUT: C29.1 C30.1 IC7.1 R12.2 TP20.1 | length 6.7
  Top Layer w0.152: R12.2@41.275,21.412 R12.2@41.402,21.412 41.986,21.412 42.037,21.463 42.494,21.463 C30.1@42.545,21.412 43.446,22.314 44.343,22.314 44.763,22.733 45.136,22.733 45.496,23.093 45.648,23.093 C29.1@45.847,23.292 46.65,23.292 46.89,23.052 46.89,22.923 46.937,22.876
TSC_G2_IO1: C9.2 IC4.44 TP5.1 | length 3.9
  Top Layer w0.152: IC4.44@56.99,9.246 56.99,8.364 58.268,7.087 ; TP5.1@58.039,6.858 58.268,7.087 ; C9.2@58.725,6.35 58.725,6.629 58.268,7.087
TSC_G2_IO2: IC4.45
TSC_G2_IO3: IC4.46 R5.1 | length 10.3
  Top Layer w0.152: IC4.46@57.99,9.246 57.99,8.971 58.111,8.85 58.111,7.929 58.844,7.196 63.211,7.196 64.528,5.879 R5.1@64.528,4.255
TSC_G2_IO4: IC4.47 R4.1 | length 11.4
  Top Layer w0.152: IC4.47@58.49,9.246 58.49,8.971 58.611,8.85 58.611,8.318 59.428,7.501 63.365,7.501 66.484,4.382 R4.1@67.449,4.382
USB_DN: IC3.1 IC4.37 TP15.1 | length 10.9
  Top Layer w0.152: TP15.1@46.482,8.763 46.462,8.743 IC3.1@45.146,8.743 45.146,8.527 45.37,8.304 45.585,8.304 45.994,7.895 50.15,7.895 51.217,8.961 51.907,8.961 51.912,8.957 53.416,8.957 53.49,9.03 IC4.37@53.49,9.246
USB_DP: IC3.3 IC4.38 TP16.1 | length 14.2
  Top Layer w0.152: TP16.1@41.91,8.001 42.504,8.001 42.807,8.304 43.022,8.304 43.246,8.527 IC3.3@43.246,8.697 ; IC3.3@43.246,8.743 IC3.3@43.246,8.697 ; IC4.38@53.99,9.246 53.916,9.172 53.916,8.774 53.672,8.53 51.908,8.53 51.781,8.657 51.343,8.657 51.033,8.347 51.033,8.331 50.292,7.59 45.868,7.59 45.711,7.747 43.969,7.747 43.667,8.048 43.667,8.13 43.578,8.219 43.47,8.219 43.434,8.255 43.434,8.509 IC3.3@43.246,8.697
VBAT: J8.17
VBAT_1: C27.1 C37.1 IC6.3 IC6.4 P3.2 PS1.8 TP10.1 | length 9.4
  Top Layer w0.152: 12.002,1.651 12.065,1.588 TP10.1@12.065,0.508
  Top Layer w0.254: IC6.4@15.114,3.557 15.392,3.557 IC6.4@15.415,3.58 IC6.3@15.415,4.08
  Top Layer w0.508: PS1.8@10.541,2.741 11.501,2.741 C37.1@11.852,2.39 12.002,2.24 12.002,1.651 12.7,1.651 P3.2@14.605,1.651 14.478,1.778 14.478,3.353 ; C27.1@14.351,3.557 IC6.4@15.114,3.557
VBAT_2: C38.1 C43.1 IC10.3 IC10.4 P4.2 PS1.6 | length 14.8
  Top Layer w0.254: C43.1@1.143,7.671 1.321,7.493 2.425,7.493 IC10.4@2.437,7.505 ; C43.1@1.143,7.798 C43.1@1.268,7.672
  Top Layer w0.508: IC10.3@2.437,7.949 IC10.4@2.437,7.505 2.437,6.326 4.191,4.572 P4.2@4.191,1.651 7.112,1.651 7.026,1.737 ; C38.1@7.026,2.39 7.026,1.737 ; 9.017,2.286 9.017,1.778 7.638,1.778 7.597,1.737 7.026,1.737
VBAT_MUX: C24.2 C40.2 IC5.A2 IC5.B2 IC9.A2 IC9.B2 PS1.7 R19.1 TP45.1 | length 41.7
  Top Layer w0.152: R19.1@11.938,4.623 12.137,4.822 12.188,4.822 v1(12.573,5.207) ; TP45.1@34.29,2.286 34.984,1.592 35.238,1.592 C24.2@35.433,1.397
  Top Layer w0.254: v3(14.478,9.144) 14.605,9.144 v3@14.859,9.398
  Top Layer w0.508: PS1.7@9.723,2.741 9.723,1.961 10.16,1.524 v3(10.287,1.524) ; C40.2@15.18,9.798 15.18,11.274 15.264,11.358 15.264,11.727 15.321,11.784 ; C24.2@35.433,1.397 35.577,1.541 35.577,3.137
  Top Layer w0.762: v3@14.859,9.398 15.18,9.398 C40.2@15.18,9.798 ; v3@33.528,4.503 35.45,2.581
  Bottom Layer w0.152: v1(12.573,5.207) 13.271,4.508
  Bottom Layer w1.27: v3(10.287,1.524) 13.271,4.508 14.224,5.461 14.478,5.207 v3(14.478,9.144) ; 14.478,4.763 17.112,4.763 17.12,4.77 23.842,4.77 24.035,4.577 33.396,4.577 v3(33.528,4.445)
VDDA/VREF: C18.1 FB1.1 IC4.8 | length 4.4
  Top Layer w0.152: IC4.8@59.69,13.446 59.702,13.458 61.248,13.458 61.679,13.889 61.679,13.939 62.053,14.313 62.193,14.173 C18.1@63.627,14.173
VFBSMPS: C16.1 IC4.31 L3.2 | length 4.9
  Top Layer w0.152: C16.1@48.387,13.538 49.976,13.538 L3.2@50.038,13.6 50.586,13.6 51.74,12.446 IC4.31@52.79,12.446
VLXSMPS: IC4.33 L3.1 | length 2.9
  Top Layer w0.152: L3.1@50.038,11.8 50.049,11.811 51.893,11.811 52.136,11.567 52.394,11.567 52.515,11.446 IC4.33@52.79,11.446
pads on no net: AC1.1 AC1.7 AC1.8 AC1.11 AC1.12 AC1.13 AC1.15 AC1.16 AC1.18 AC1.21 AC1.22 AC1.23 AC1.24 ANT1.2 H1. IC4.6 IC4.9 IC4.11 IC4.12 IC4.15 IC4.16 IC4.17 IC4.26 IC4.27 IC4.28 IC4.29 IC4.30 IC6.7 IC8.14 IC8.15 IC8.21 IC8.29 IC10.7 IC11.7 IC11.8 J5.7 J5.8 J5.9 J6.7 J6.8 J6.9 LPF1.2 LPF1.6 S1.1 S1.4 S1.5 S1.6 S1.7 S1.8 S1.9 U3.1 U3.3 Y2.2 Y2.4 Y3.2 Y3.4

## Polygon pours and split planes (outlines as drawn)
GND on Bottom Layer "Bottom Layer-GND" (solid, remove dead copper, pour order 10): 0.254,30.71 0.254,0.254 75.053,0.254 75.061,30.758
3.3V_MCU on Bottom Layer "Bottom Layer-3.3V_MCU" (solid, pour order 2): 35.687,7.112 35.687,4.445 36.703,3.429 51.125,3.429 54.427,6.731 62.23,6.731 62.23,8.89 49.027,8.89 49.149,20.193 49.131,20.175 46.803,20.175 44.704,18.076 44.704,7.112
3.3V_PWR on Bottom Layer "Bottom Layer-3.3V_PWR" (solid, remove dead copper, pour order 0): 15.748,15.367 15.748,20.447 24.511,16.764 33.08,13.656 42.037,13.589 42.037,7.366 33.655,7.366 33.655,11.176 25.046,11.8 16.637,13.208 16.39,13.589
no net on Bottom Layer "Bottom Layer-No Net" (solid, pour order 6): 0.127,30.734
3.3V_MCU on Bottom Layer "Bottom Layer-3.3V_MCU 1" (solid, pour order 4): 62.23,8.128 60.833,8.128 60.833,16.637 62.23,16.637
GND on Top Layer "Top Layer-GND" (solid, remove dead copper, pour order 12): 51.163,30.733 51.163,13.589 75.311,13.589 75.311,30.774

## Keep-outs
Keep-Out Layer:
  region: 75.489,30.937 72.386,30.937 72.386,25.937 75.489,25.937

## Other copper
Top Layer:
  region: 73.319,27.782 72.819,27.782 72.819,26.282 73.319,26.282
  region: 75.319,30.782 74.819,30.782 74.819,26.282 75.319,26.282
  region: 75.319,26.782 72.819,26.782 72.819,26.282 75.319,26.282
  region net NetANT1_1: 73.584,29.38 72.441,29.38 72.441,28.58 73.584,28.58
  region net NetANT1_1: 73.584,30.81 72.734,30.81 72.734,28.58 73.584,28.58

## Silkscreen, mask and mechanical layers (free items; w line width, h text height)
Bottom Overlay:
  lines w0.1: 19.177,25.16 52.752,25.16 ; 19.304,0.508 19.304,30.353 ; 19.306,14.988 52.832,14.988 ; 22.225,0.635 22.225,30.48 ; 24.765,0.635 24.765,30.48 ; 27.305,0.508 27.305,30.353 ; 29.845,0.635 29.845,30.48 ; 32.385,0.635 32.385,30.48 ; 34.925,0.635 34.925,30.48 ; 37.465,0.508 37.465,30.353 ; 40.005,0.508 40.005,30.353 ; 42.545,0.381 42.545,30.226 ; 45.085,0.635 45.085,30.48 ; 47.498,0.635 47.498,30.48 ; 50.165,0.508 50.165,30.353 ; 52.832,0.508 52.832,30.353
  text "GND /  / GND /  / TP_THERMISTOR /  / 5V /  / LED_FRONT_B /  / LED_FRONT_R /  / LED_FRONT_G /  / GND /  / GND /  / GND /  / LED_SIDE_R /  / LED_SIDE_B /  / LED_SIDE_G" at 20.167,15.76 h0.71 r270
  text "PROJECT CAPTIVATE / EVAL BOARD _ v2.0 / PATRICK CHWALEK / DAVID RAMSAY / 08.21.2019" at 73.66,11.049 h0.9
  text "I2C1_SDA /  / IMU_INT /  / TP_NOSE /  / CMOUT /  / VBAT /  / GND /  / 3V_PWR /  / BLINK_PWM /  / BATTERY_1 /  / LH_DIODE_ARRAY /  / I2C1_SCL /  / EXPANSION_INT /  / BLINK_SIG" at 19.913,4.203 h0.71 r270
Mechanical Outline:
  the board outline again, w0.005